# Altium PCB flowSensorFlexible.PcbDoc
Units mil, origin at the board's own origin, x right, y up, seen from the top; angles counter-clockwise.
Board outline 2350 x 530 mil, 2 copper layers (Top Layer, Bottom Layer); 34 components, 8 nets, 45 pads, 10 vias.
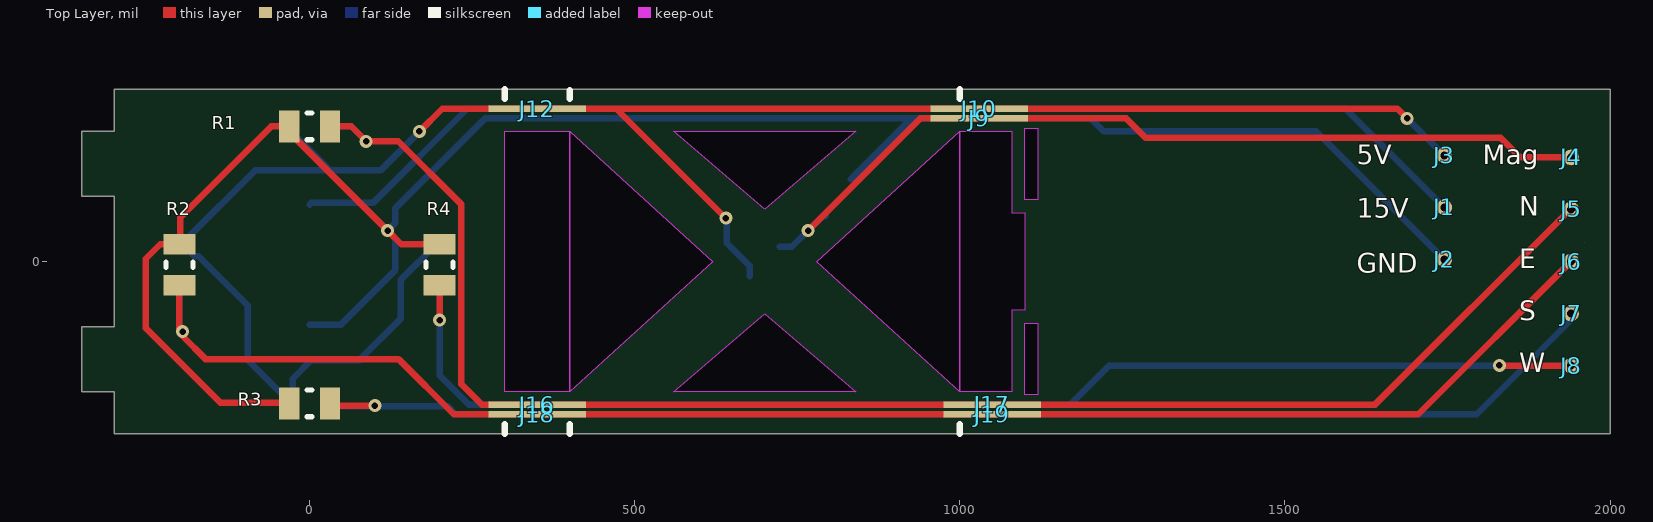
[diagram p0: Top Layer view]
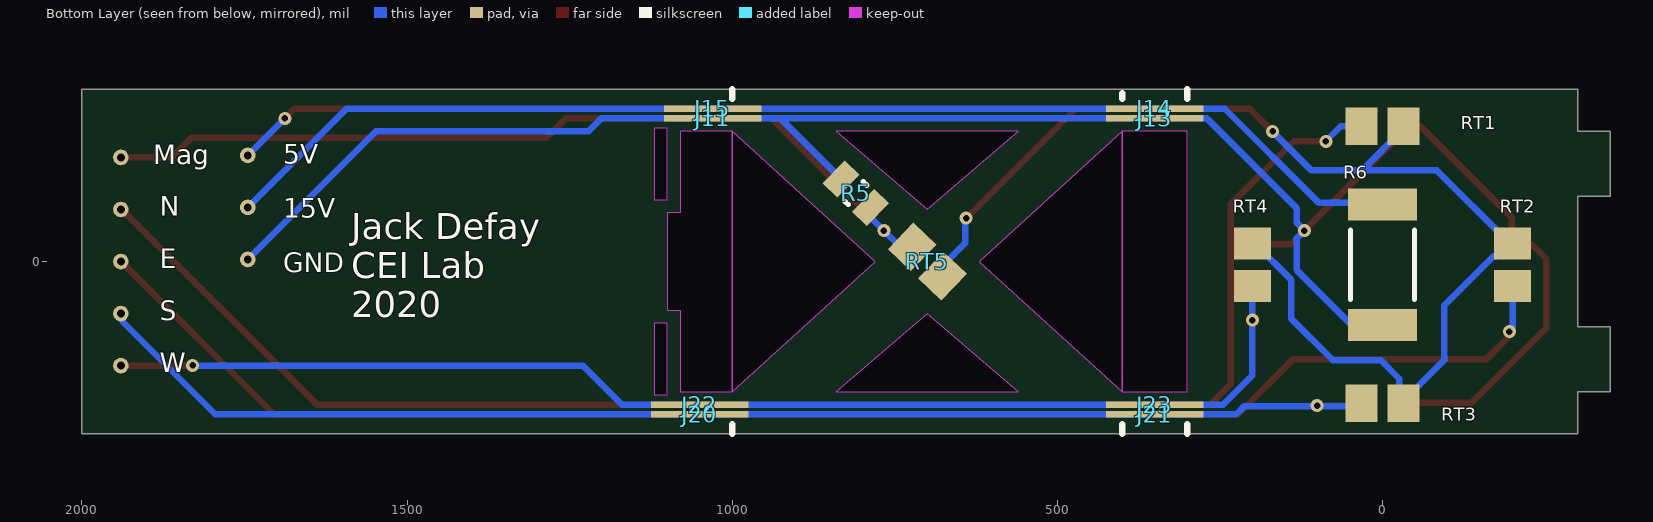
[diagram p1: Bottom Layer view, seen from below]
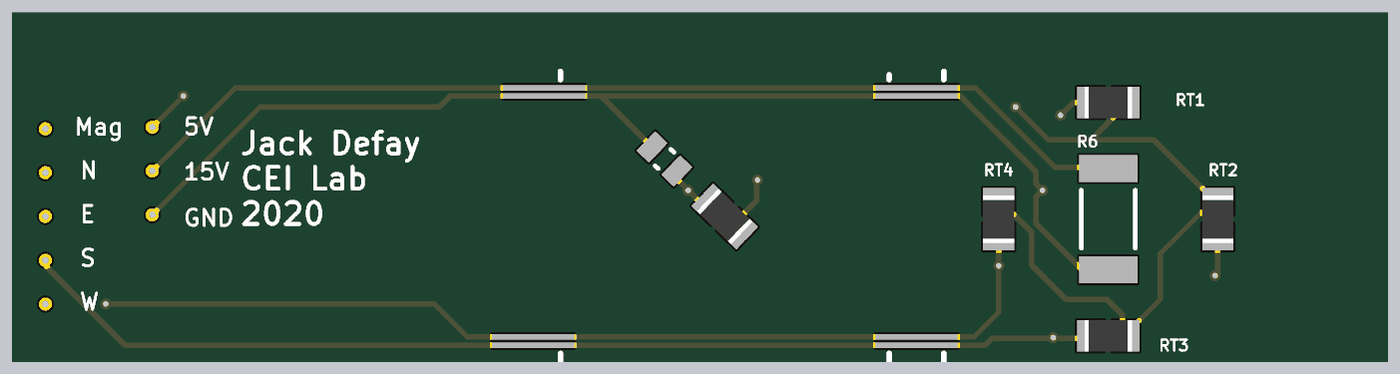
[diagram p2: 3D render of the assembled board from below, using the file's embedded part models]

## Layer stack, top to bottom
Top Solder: solder mask 0.4, Solder Resist, Dk 3.5
Top Layer: signal copper 1.4
Dielectric 1: dielectric 12.6, FR-4, Dk 4.8
Bottom Layer: signal copper 1.4
Bottom Solder: solder mask 0.4, Solder Resist, Dk 3.5

## Board outline
-350,-200 -300,-200 -300,-265 2000,-265 2000,265 -300,265 -300,200 -350,200 -350,100 -300,100 -300,-100 -350,-100
cut-out: 1000,200 1000,-200 780,0
cut-out: 1000,-200 1000,200 1080,200 1080,75 1100,75 1100,-75 1080,-75 1080,-200
cut-out: 400,-200 400,200 620,0
cut-out: 300,200 400,200 400,-200 300,-200
cut-out: 840,-200 560,-200 700,-80
cut-out: 1100,-95 1120,-95 1120,-205 1100,-205
cut-out: 1960,30
cut-out: 1890,90
cut-out: 1100,205 1120,205 1120,95 1100,95
cut-out: 560,200 840,200 700,80
cut-out: -510,371.5

## Design rules (kind name [scope] priority, off if disabled: settings)
Clearance [All] p1: gap=4 ignorepadtopadclearanceinfootprint=FALSE except(0: Arc-Hole Track-Hole SMDPad-Hole THPad-Hole Via-Hole Fill-Hole Poly-Hole Region-Hole Text-Hole)
MinimumSolderMaskSliver [All] p1: minsoldermaskwidth=4
PolygonConnect [All] p1: connectstyle=Relief reliefconductorwidth=10 reliefentries=4 polygonreliefangle="90 Angle" airgapwidth=10
RoutingVias [All] p1: holewidth=28 width=50 viastyle="Through Hole" minholewidth=28 minwidth=50 maxholewidth=28 maxwidth=50
SilkToSolderMaskClearance [IsPad] p1: minsilkscreentomaskgap=5 clearancetoexposedcopper=TRUE
SolderMaskExpansion [All] p1: expansion=4 istentingtop=FALSE
Width [All] p1: maxlimit=50 minlimit=10 preferedwidth=10 minimp=50.000000 maximp=50.000000 favimp=50.000000
28 further rules are at their usual default settings.

## Classes and differential pairs
component class [04]-Connector: J1 J2 J3 J4 J5 J6 J7 J8 J9 J10 J11 J12 J13 J14 J15 J16 J17 J18 J19 J20 J21 J22 J23
component class "[03]-Heating Element": R6
component class [02]-Thermistors: R1 R2 R3 R4 R5 RT1 RT2 RT3 RT4 RT5

## Components (designator, comment, footprint, x,y, rotation, side; value= is the part's Value field where it differs from the comment)
J1 "15V" PIN 1744.93,83.15 r0 top
J2 "GND" PIN 1744.93,3.15 r0 top
J3 "5V" PIN 1744.93,163.15 r0 top
J4 "sensor_pad" PIN 1940,160 r0 top
J5 "sensor_pad" PIN 1940,80 r0 top
J6 "sensor_pad" PIN 1940,0 r0 top
J7 "sensor_pad" PIN 1940,-80 r0 top
J8 "sensor_pad" PIN 1940,-160 r0 top
J9 "structural_pad" STRUCTURAL_PAD#1 1050,305 r180 top
J10 "structural_pad" STRUCTURAL_PAD#2 1030,235 r180 top
J11 "structural_pad" STRUCTURAL_PAD#2 1030,220 r0 bottom
J12 "structural_pad" STRUCTURAL_PAD#3 350,240 r180 top
J13 "structural_pad" STRUCTURAL_PAD#4 280,290 r0 bottom
J14 "structural_pad" structural_pad#1 350,235 r180 bottom
J15 "structural_pad" structural_pad#1 1030,235 r180 bottom
J16 "structural_pad" structural_pad#1 350,-220 r180 top
J17 "structural_pad" structural_pad#1 1050,-220 r180 top
J18 "structural_pad" structural_pad#1 350,-235 r180 top
J19 "structural_pad" structural_pad#1 1050,-235 r180 top
J20 "structural_pad" structural_pad#1 1050,-235 r180 bottom
J21 "structural_pad" structural_pad#1 350,-235 r0 bottom
J22 "structural_pad" structural_pad#2 1020,-221.43 r180 bottom
J23 "structural_pad" structural_pad#1 350,-220 r180 bottom
R1 "10kOhm" RESC2013X60X35LL10T20 0,208 r0 top
R2 "10kOhm" RESC2013X60X35LL10T20 -200,-5 r270 top
R3 "10kOhm" RESC2013X60X35LL10T20 0,-218 r0 top
R4 "10kOhm" RESC2013X60X35LL10T20 200,-5 r270 top
R5 "10kOhm" RESC2013X60X35LL10T20 810,105 r224 bottom
R6 "100 Ohm" RESC2010(5025)_N 0,-5 r90 bottom
RT1 "10kOhm" RESC2013X100X45NL20T25 0,208 r180 bottom
RT2 "10kOhm" RESC2013X100X45NL20T25 -200,-5 r90 bottom
RT3 "10kOhm" RESC2013X100X45NL20T25 0,-218 r180 bottom
RT4 "10kOhm" RESC2013X100X45NL20T25 200,-5 r90 bottom
RT5 "10kOhm" RESC2013X100X45NL20T25 700,0 r224 bottom

## Footprints (in the part's own frame and the unit in brackets; to place one, negate y for a bottom-side part, rotate by r counter-clockwise, add the part's x,y. Pads: shape width x height; smd on the part's side, far side on the other; paste and mask are expansions set on the pad)
PIN [mil]
  round 24 hole 12: 1(0,0)
RESC2010(5025)_N [mm] "Chip Resistor, Body 5.0x2.5mm, IPC Medium Density"
  rect 1.25x2.7 smd: 1(-2.35,0) 2(2.35,0)
  silkscreen extent -1.35,-1.25 1.35,1.25, body extent -2.6,-1.35 2.6,1.35, height 0.71
RESC2013X60X35LL10T20 [mm]
  rect 0.8x1.25 smd: 1(-0.8,0) 2(0.8,0)
  silkscreen extent -0.1,-0.53 0.1,0.53, body extent -1.05,-0.67 1.05,0.67, height 0.6
RESC2013X100X45NL20T25 [mm] "Chip Resistor, 2-Leads, Body 2.2x1.45mm, IPC Medium Density"
  rect 1.25x1.45 smd: 1(-0.825,0) 2(0.825,0)
  body extent -1.1,-0.72 1.1,0.72, height 1
STRUCTURAL_PAD#1 [mil]
  rect 150x10 smd mask+4: 1(20,85)
STRUCTURAL_PAD#2 [mil]
  rect 150x10 smd mask+4: 1(0,0)
STRUCTURAL_PAD#3 [mil]
  rect 150x10 smd mask+4: 1(0,5)
STRUCTURAL_PAD#4 [mil]
  rect 150x10 smd mask+4: 1(70,70)
structural_pad#1 [mil]
  rect 150x10 smd mask+4: 1(0,0)
structural_pad#2 [mil]
  rect 150x10 smd mask+4: 1(-30,1.43)

## Part data
J3: library part 15V
R1 R2 R3 R4 R5: library part CMP-1659-00013-2, "RES 10.0K OHM 1/8W 1% 0805 SMD", Manufacturer=Yageo, MPN=RC0805FR-0710KL, ComponentLink1Description=Datasheet, ComponentLink1URL=http://www.yageo.com/documents/recent/PYu-RC_Group_51_RoHS_L_04.pdf, PackageReference=0805
R6: library part CMP-1017-00308-1, "100 Ohms ±1% 2W Chip Resistor 2010 (5025 Metric) Thick Film", Case-EIA=2010, Manufacturer="TE Connectivity Passive Product", MPN=3502100RFT
RT1 RT2 RT3 RT4 RT5: library part CMP-2000-06827-1, "Chip Thermistor, 10 KOhm, +/- 5%, 200 mW, -40 to 125 degC, 0805 (2012 Metric), RoHS, Tape and Reel", Manufacturer=Murata, MPN=NTCS0805E3103FLT, Package Reference=0805, Type=NTC

## Via types
v1: diameter 20, hole 10, Top Layer to Bottom Layer, tented both sides, 10 vias

## Nets (pads, with @x,y where several pads share a name; then routed paths per layer and width w, separated by ;. In a path a pad name is that pad's centre, name@x,y a point inside that pad or via, vN(x,y) a via of type N, cw(c..) or ccw(c..) an arc to the next point about the centre after c; other vN are vias at no path point)
5V: J3.1 J10.1 J12.1 RT1.2 RT2.2 RT3.2 RT4.2 RT5.2 | length 3189.7
  Top Layer w10: v1(169.1,200) 204.1,235 J12.1 471.86,235 ; v1(640.21,66.64) 471.86,235 ; v1(1688.08,220) 1673.08,235 J10.1 471.86,235
  Bottom Layer w10: RT2.2@-192.13,31.42 -83.54,140 31.58,140 ; RT2.2@-189.92,27.48 -189.92,21.34 -176.46,7.87 -170.32,7.87 -94.96,-67.48 -94.96,-151.58 -32.48,-214.06 RT3.2 -25.94,-211.46 -25.94,-180.31 2.8,-151.58 76.65,-151.58 140,-88.23 140,-28.58 196.06,27.48 RT4.2 ; RT1.2 -32.48,204.06 31.58,140 ; v1(169.1,200) 109.1,140 31.58,140 ; v1(640.21,66.64) 641.83,65.03 641.83,28.17 676.64,-6.64 RT5.2 ; v1(1688.08,220) J3.1
15V: J1.1 J14.1 J15.1 R6.2 | length 1868.9
  Bottom Layer w10: R6.2 2.48,90 97.47,90 242.47,235 J14.1 J15.1 1593.08,235 J1.1
GND: J2.1 J11.1 J13.1 R1.1 R2.1 R3.1 R4.1 R5.1 R6.1 | length 3177.1
  Top Layer w10: R2.1 -229.61,26.5 -251.76,4.35 -251.76,-102.42 -137.06,-217.12 -32.38,-217.12 R3.1 ; R2.1@-198.92,27.58 -198.92,67.57 -58.49,208 R1.1 -31.5,199.14 v1(120,47.65) 141.15,26.5 R4.1
  Bottom Layer w10: R6.1 47.69,-97.52 132.19,-13.02 132.19,35.46 129.26,38.39 v1(120,47.65) 132.19,59.83 132.19,82.19 270,220 J13.1 925.78,220 ; R5.1 925.78,220 ; J2.1 1548.08,200 1221.26,200 1201.26,220 J11.1 925.78,220
read0: J4.1 J9.1 R5.2 RT5.1 | length 1359.8
  Top Layer w10: v1(766.78,47.65) 939.14,220 J9.1 1255.87,220 1285.87,190 1831.73,190 1861.73,160 J4.1
  Bottom Layer w10: RT5.1 741.7,22.56 v1(766.78,47.65) 788.76,69.63 R5.2@794.2,69.63
read1: J5.1 J16.1 J17.1 R1.2 RT1.1 | length 2436.1
  Top Layer w10: R1.2 64,208 v1(87.08,184.92) 136.38,184.92 233.61,87.69 233.61,-188.69 264.92,-220 J16.1 J17.1 1638.57,-220 1938.57,80 J5.1
  Bottom Layer w10: RT1.1 64,208 v1(87.08,184.92)
read2: J6.1 J18.1 J19.1 R2.2 RT2.1 | length 2433.1
  Top Layer w10: v1@-200,-107.93 R2.2 ; v1(-195,-107.93) -195,-115 -160,-150 136.73,-150 221.73,-235 J18.1 J19.1 1705,-235 J6.1
  Bottom Layer w10: RT2.1 -200,-100.22 -195,-105.22 v1(-195,-107.93)
read3: J7.1 J20.1 J21.1 R3.2 RT3.1 | length 2056.2
  Top Layer w10: R3.2 34.93,-221.43 v1(100.44,-221.43)
  Bottom Layer w10: RT3.1 37.41,-222.93 98.94,-222.93 v1(100.44,-221.43) 101.94,-222.93 212.93,-222.93 225,-235 J21.1 J20.1 1795,-235 1937.32,-92.68 1937.32,-82.68 J7.1
read4: J8.1 J22.1 J23.1 R4.2 RT4.1 | length 1974.7
  Top Layer w10: v1(200,-90) R4.2 ; v1(1829.8,-159.8) 1830,-160 J8.1
  Bottom Layer w10: RT4.1 v1(200,-90) 200,-175.08 244.92,-220 J23.1 J22.1 1170,-220 1230,-160 1829.59,-160 v1(1829.8,-159.8)

## Silkscreen, mask and mechanical layers (free items; w line width, h text height)
Top Overlay:
  lines w10: 300,-265 300,-250 ; 300,250 300,265 ; 400,-265 400,-250 ; 400,250 400,263.67 ; 1000,-265 1000,-250 ; 1000,250 1000,265
  text "5V" at 1610.71,149.56 h30
  text "Mag" at 1804.07,149.56 h30
  text "N" at 1860,70 h30
  text "15V" at 1610.71,67.09 h30
  text "E" at 1860,-10 h30
  text "GND" at 1610.71,-17.15 h30
  text "S" at 1860,-90 h30
  text "W" at 1860,-170 h30
Bottom Overlay:
  lines w10: 300,-265 300,-250 ; 300,250 300,265 ; 400,-265 400,-250 ; 400,250 400,258.67 ; 1000,-265 1000,-250 ; 1000,250 1000,265
  text "5V" at 1690.71,149.98 h30
  text "Mag" at 1890,149.56 h30
  text "N" at 1880,70 h30
  text "15V" at 1690.71,67.51 h30
  text "E" at 1880,-10 h30
  text "GND" at 1690.71,-16.72 h30
  text "Jack Defay / CEI Lab / 2020" at 1585.73,-85.38 h40
  text "S" at 1880,-90 h30
  text "W" at 1880,-170 h30
Board_Outline:
  lines w10: -350,-200 -300,-200 -300,-265 300,-265 400,-265 1000,-265 2000,-265 2000,265 1000,265 400,265 300,265 -300,265 -300,200 -350,200 -350,100 -300,100 -300,-100 -350,-100 -350,-200 ; 300,-200 400,-200 620,0 400,200 300,200 300,-200 ; 560,-200 840,-200 700,-80 560,-200 ; 560,200 840,200 700,80 560,200 ; 780,0 1000,-200 1080,-200 1080,-75 1100,-75 1100,75 1080,75 1080,200 1000,200 780,0 ; 1100,-205 1100,-95 1120,-95 1120,-205 1100,-205 ; 1100,95 1120,95 1120,205 1100,205 1100,95